# EAGLE board PortableAlarmSystem2 (EAGLE 9.5.2)
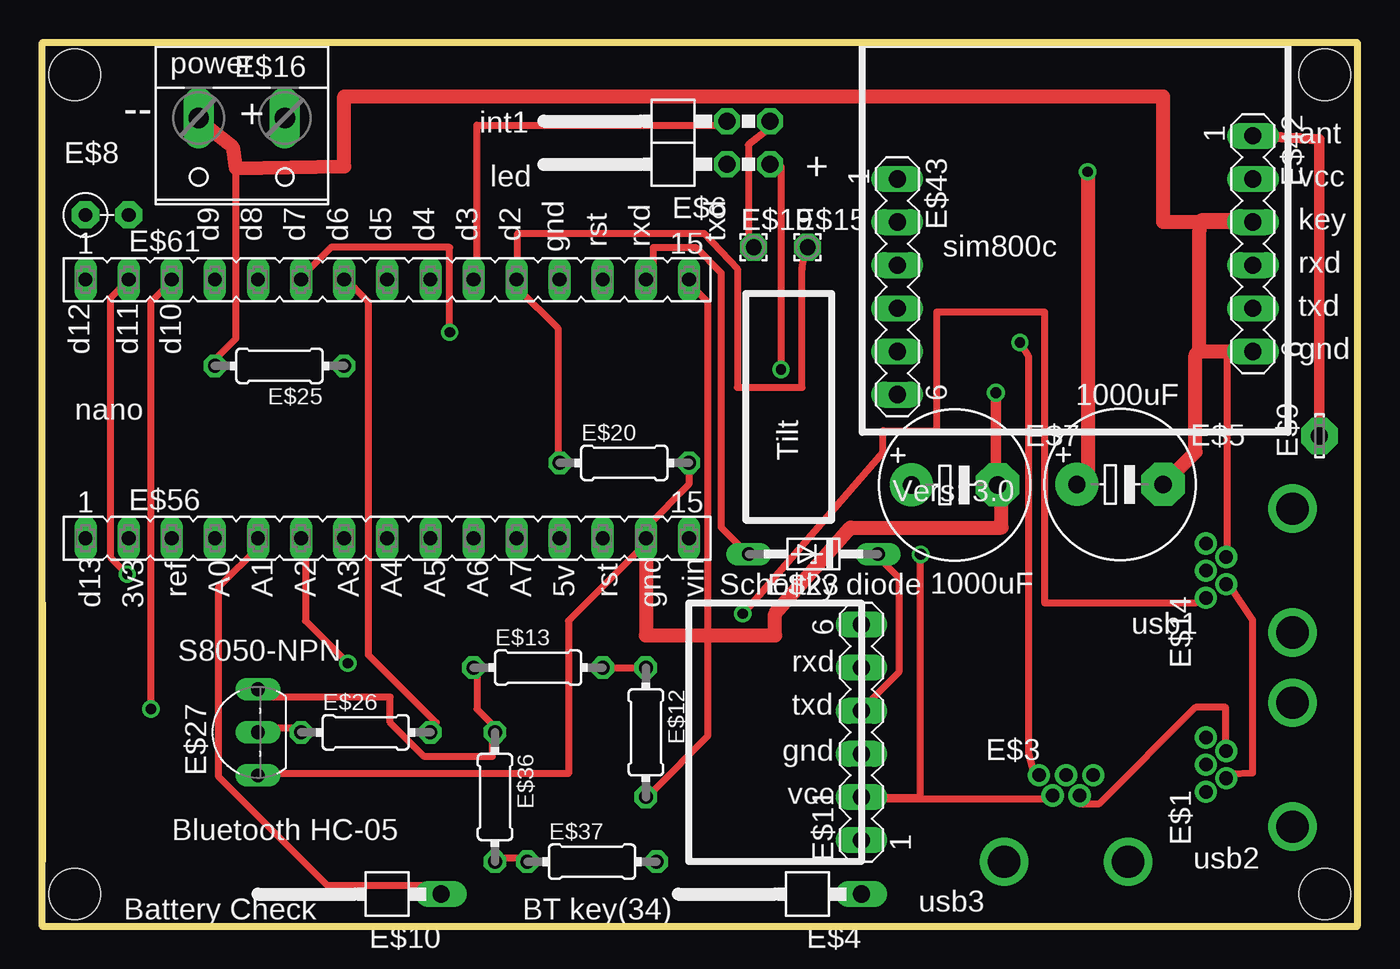
[diagram p0: board, top side]
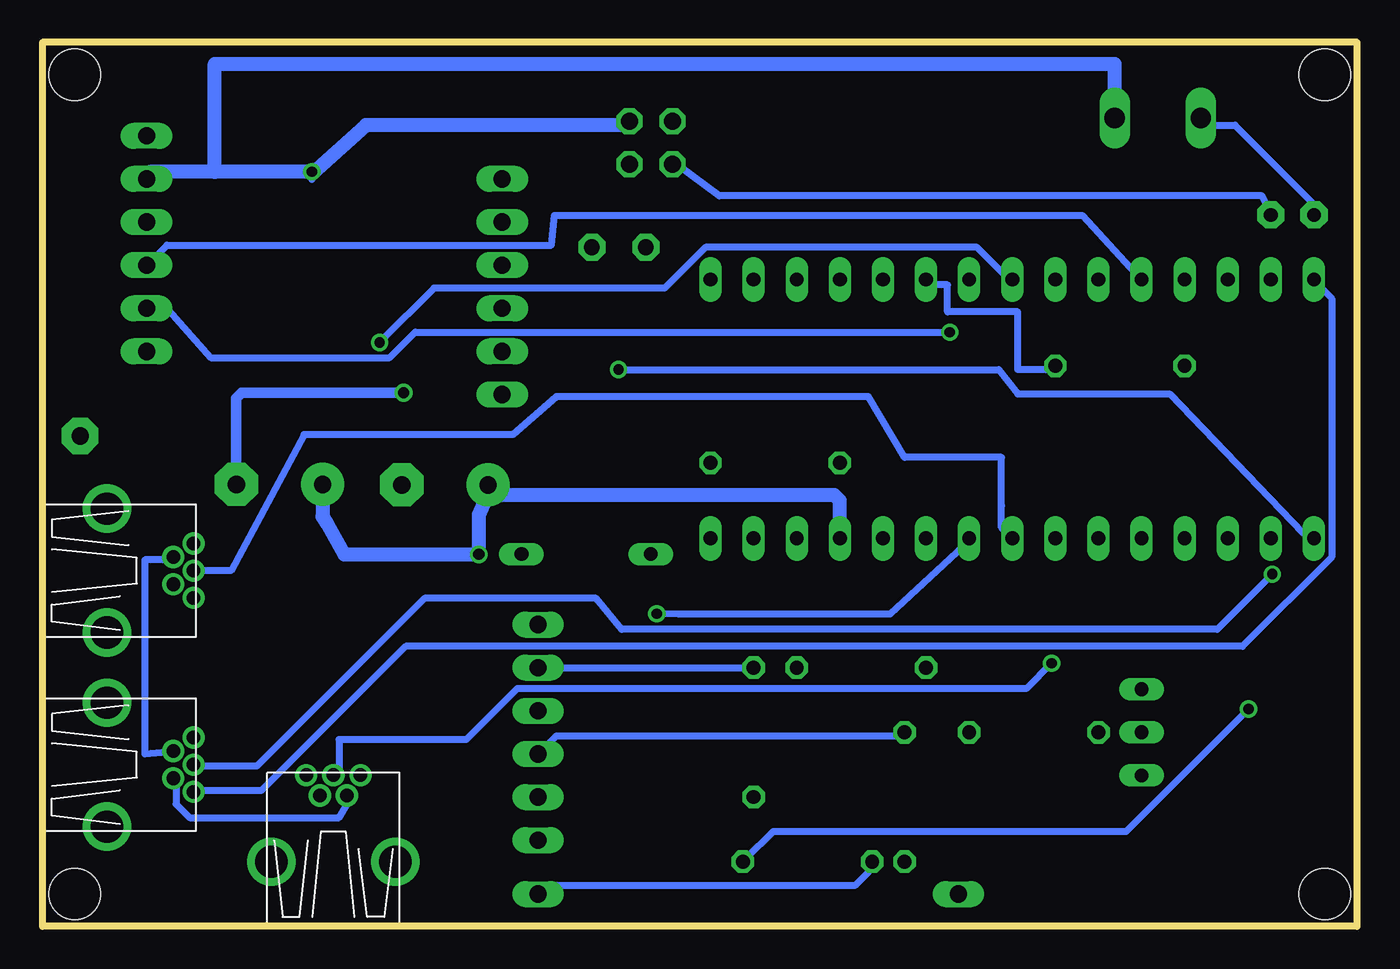
[diagram p1: board, bottom side, seen from below]

Size 77.47 x 52.07 mm. Coordinates in mm from the lower left corner, seen from the top.
Outline: 0,0 0,52.07 77.47,52.07 77.47,0 0,0
Copper layers (1*16): Top 0.035mm / dielectric 1.5mm / Bottom 0.035mm
Design rules "default": minimum track width 10mil, minimum drill 24mil, track to track 8mil, track to pad 8mil, pad to pad 8mil, via to via 8mil, smd to smd 8mil, copper to edge 40mil, drill to drill 8mil, minimum pad ring 10mil, minimum via ring 8mil, stop-mask expansion 4mil, vias tented up to drill 0mil, thermal gap 10mil
Holes 3 mm at 1.91,50.16 75.56,50.16 1.91,1.91 75.56,1.91

## Footprints (pad centres in the part's own frame; a part is rotated, then mirrored left to right if it is on the bottom)
USB-MB-H = drill 0.8: D+ 5.1,0; D- 3.9,0.8; GND 5.1,-1.6; ID 3.9,-0.8; VBUS 5.1,1.6 | drill 1.9: P$6 0,-3.65; P$7 0,3.65
1X01/90 = drill 1.016 long: 1 -1.27,-3.81
E5-8,5 = drill 1.016 pad 2.54: + -2.54,0 | drill 1.016 pad 2.54 octagon: - 2.54,0
2X02/90 = drill 1.016 octagon: 1 -1.27,-6.35; 2 -1.27,-3.81; 3 1.27,-6.35; 4 1.27,-3.81
RS-2,5 = drill 0.813 pad 1.6 octagon: 1 -1.27,0; 2 1.27,0
LSP10 = drill 1.016 pad 2.159 octagon: MP 0,0
MA06-1 = drill 1.016 long: 1 -6.35,0; 2 -3.81,0; 3 -1.27,0; 4 1.27,0; 5 3.81,0; 6 6.35,0
0204/7 = drill 0.813 octagon: 1 -3.81,0; 2 3.81,0
1,6/0,9 = drill 0.914 pad 1.6 octagon: 1 0,0
W237-132 = drill 1.194 long: 1 -2.54,-0.635; 2 2.54,-0.635
DO34Z7 = drill 0.813 long: A 3.81,0; C -3.81,0
TO92- = drill 0.813 long: 1 2.54,0; 2 0,0; 3 -2.54,0
FE15 = drill 0.813 long: 1 -17.78,0; 2 -15.24,0; 3 -12.7,0; 4 -10.16,0; 5 -7.62,0; 6 -5.08,0; 7 -2.54,0; 8 0,0; 9 2.54,0; 10 5.08,0; 11 7.62,0; 12 10.16,0; 13 12.7,0; 14 15.24,0; 15 17.78,0

## Placement (x,y rotation side)
E$1  [USB-MB-H]  73.66,9.53 180 top
E$3  [USB-MB-H]  60.33,3.81 90 top
E$4  [1X01/90]  44.45,3.17 90 top
E$5  [E5-8,5]  63.5,26.04 0 top
E$6  [2X02/90]  36.53,46.16 90 top
E$7  [E5-8,5]  53.75,26 0 top
E$8  220 R  [RS-2,5]  3.81,41.91 0 top
E$9  [LSP10]  75.25,28.89 90 top
E$10  [1X01/90]  19.68,3.17 90 top
E$11  [MA06-1]  48.26,11.43 90 top
E$12  10k  [0204/7]  35.56,11.43 270 top
E$13  22k  [0204/7]  29.21,15.24 0 top
E$14  [USB-MB-H]  73.66,20.95 180 top
E$15  [1,6/0,9]  45.09,40.01 0 top
E$16  [W237-132]  11.75,46.99 180 top
E$19  [1,6/0,9]  41.91,40.01 0 top
E$20  10k  [0204/7]  34.29,27.3 0 top
E$23  [DO34Z7]  45.43,21.93 180 top
E$25  10k  [0204/7]  13.97,33.02 180 top
E$26  2.2k  [0204/7]  19.05,11.43 0 top
E$27  [TO92-]  12.7,11.43 90 top
E$36  22k  [0204/7]  26.67,7.62 270 top
E$37  10k  [0204/7]  32.38,3.81 0 top
E$42  [MA06-1]  71.33,40.22 270 top
E$43  [MA06-1]  50.38,37.68 270 top
E$56  [FE15]  20.32,22.86 0 top
E$61  [FE15]  20.32,38.1 0 top

## Library data of the parts
E$1 E$3 E$14 = con-usb-3
E$4 E$6 E$10 = pinhead
E$5 E$7 = ref-packages-longpad
E$8 = discrete
E$9 = solpad
E$11 E$42 E$43 = con-lstb
E$12 E$13 E$20 E$25 E$26 E$36 E$37 = eagle-ltspice
E$15 E$19 = wirepad
E$16 = con-wago-508
E$23 = ref-packages
E$27 = transistor-fet
E$56 E$61 = con-lsta

## Nets
S$2: E$1.ID E$3.ID E$5.- E$7.- E$8.1 E$14.ID E$16.2 E$20.2 E$25.2 E$27.3 E$42.3 E$42.6 E$56.14
S$3: E$11.4 E$23.C
S$4: E$1.D- E$3.D- E$5.+ E$6.3 E$7.+ E$11.2 E$14.D- E$16.1 E$19.1 E$42.2 E$56.12
S$5: E$37.2 E$61.3
S$7: E$6.2 E$8.2
S$8: E$6.4 E$25.1 E$61.10
S$9: E$9.MP E$42.1
S$10: E$26.1 E$27.2
S$11: E$12.2 E$61.15
S$12: E$42.5 E$61.6
S$13: E$42.4 E$61.5
S$14: E$23.A E$61.14
S$15: E$1.VBUS E$61.1
S$16: E$1.D+ E$61.2
S$17: E$3.VBUS E$61.8
S$18: E$11.3 E$13.1 E$27.1 E$36.1
S$19: E$61.12
S$20: E$26.2 E$61.7
S$21: E$61.13
S$22: E$6.1 E$56.1
S$23: E$56.2
S$24: E$56.3
S$25: E$3.D+ E$56.6
S$27: E$10.1 E$56.5
S$29: E$56.7
S$30: E$14.D+ E$56.8
S$31: E$4.1 E$36.2 E$37.1
S$32: E$14.VBUS E$56.9
S$34: E$11.5 E$12.1 E$13.2
S$35: E$15.1 E$20.1 E$61.11
S$37: E$56.13
S$38: E$56.15

## Tracks (layer width: path | path; a pad name or v marks a point on that pad's centre or on a via)
S$2  (via drill 0.65)
  Top 0.152: E$42.3 71.12,41.59
  Top 0.254: E$7.- 56.5,26 56.52,26 | 35.5,22.5 E$56.14 | 13,9 E$27.3
  Top 0.406: E$20.2 38.1,26.04 35.56,23.5 E$56.14 | 35.5,22.5 31,18 31,9 13,9 | 11.4,44.67 11.4,34.62 10.4,33.6 E$25.2 | 9.6,47.2 E$16.2 | 69.8,33.87 69.8,22.4 E$14.ID | E$1.ID 69.73,10.28 69.73,12.9 67.95,12.9 62.25,7.2 61.12,7.2 E$3.ID
  Top 0.61: 56.52,26.04 56.2,26.35 v56.2,31.43 | 69.8,33.87 E$42.6
  Top 0.813: 56.52,26.04 56.52,26 56.52,23.5 47.62,23.5 43.18,18.41 43.18,17.14 35.56,17.14 E$56.14 | E$42.3 66.04,41.49 66.04,48.9 17.78,48.9 17.78,44.77 11.4,44.67 11.2,45.92 9.6,47.2 | E$5.- 67.94,27.94 67.94,33.66 68.16,33.87 | 68.16,33.87 E$42.6 | 71.12,41.59 68.26,41.59 68.16,40.85 68.16,33.87
  Bottom 0.254: 56.5,26 E$7.-
  Bottom 0.406: E$8.1 2.4,42.4 7.2,47.2 8.8,47.2 E$16.2 | E$14.ID 70.4,21.6 71.44,21.59 71.44,10.16 E$1.ID
  Bottom 0.61: v56.2,31.43 65.72,31.43 66.04,31.11 E$5.-
S$3
  Top 0.254: 48.5,13 E$11.4
  Top 0.406: 48.5,13 50.5,15 50.5,20.5 49.5,21.5 E$23.C
S$4  (via drill 0.61, 0.65)
  Top 0.254: 70,20 E$14.D- | 70,9 E$1.D- | 59.5,7.5 E$3.D- | 48.5,7.5 E$11.2 | 61.28,25.72 61,26 E$5.+
  Top 0.406: 70,20 71.32,18.05 71.32,9.05 70,9 | 59.5,7.5 48.5,7.5 | E$19.1 41.59,40.64 41.59,46.04 42.82,47 E$6.3 | E$11.2 51.75,7.62 v51.75,21.91
  Top 0.813: v61.59,44.45 61.59,26.04 61.28,25.72 60.96,25.4
  Bottom 0.254: 70,20 E$14.D- | 60.5,26 E$5.+
  Bottom 0.406: E$1.D- 69.6,8.8 69.6,7.2 68.8,6.4 60,6.4 59.52,7.2 E$3.D- | E$42.2 arc60 71.12,44.45 | v61.59,44.45 61.59,44 61.6,44.32 | 43.2,47.2 E$6.3
  Bottom 0.813: 51.24,25.4 E$7.+ | 51.24,25.4 30.8,25.4 30.48,25.08 E$56.12 | 67.31,44.45 71.12,44.45 | 67.31,44.45 67.31,50.8 14.29,50.8 E$16.1 | v61.59,44.45 67.31,44.45 | 61.6,44.32 58.4,47.2 43.2,47.2 | E$5.+ 60.96,24.13 60.68,23.71 59.69,21.91 v51.75,21.91 51.75,24.25 51.24,25.4
S$5  (via drill 0.61)
  Top 0.406: v6.4,12.8 6.4,36.8 7.2,37.6 E$61.3
  Bottom 0.406: v6.4,12.8 13.6,5.6 34.4,5.6 36,4 E$37.2
S$7
  Bottom 0.406: E$6.2 40,44.8 37.6,43.03 5.6,43.03 E$8.2
S$8
  Top 0.406: E$6.4 40,47.2 25.6,47.2 25.6,38.4 E$61.10
  Bottom 0.406: E$61.10 25.08,37.78 24.13,37.78 24.13,36.2 20,36.2 20,33.66 20,32.8 18.4,32.8 E$25.1
S$9
  Top 0.61: E$9.MP 75.25,46.35 E$42.1
S$10
  Top 0.406: E$27.2 12.8,11.68 15.2,11.68 E$26.1
S$11
  Top 0.406: E$12.2 36,8 39.2,11.2 39.2,36.8 38.4,37.6 E$61.15
S$12  (via drill 0.61)
  Top 0.254: 15.5,38.5 E$61.6
  Top 0.406: 15.5,38.5 17,40 24,40 v24,35
  Bottom 0.406: v24,35 55.5,35 57,33.5 67.55,33.5 70.05,36.32 E$42.5
S$13
  Bottom 0.254: 12.75,38.12 E$61.5 | 71.25,39 E$42.4
  Bottom 0.406: 12.75,38.12 16.19,41.88 47.3,41.88 47.47,40.12 70.12,40.12 71.25,39
S$14
  Top 0.254: 41.5,22 E$23.A
  Top 0.406: 41.5,22 40,23.5 40,38.5 38.5,40 36,40 36,38.5 E$61.14
S$15
  Bottom 0.254: 68.5,8 E$1.VBUS | 2.5,38 E$61.1
  Bottom 0.406: 68.5,8 64.57,8 56.07,16.5 6.75,16.5 1.5,21.75 1.5,37 2.5,38
S$16  (via drill 0.61)
  Top 0.254: 5,38 E$61.2
  Top 0.406: v5,20.75 4,21.75 4,37 5,38
  Bottom 0.254: 68.5,9.43 E$1.D+
  Bottom 0.406: 68.5,9.43 64.84,9.43 54.95,19.32 44.84,19.32 43.34,17.5 8.25,17.5 v5,20.75
S$17  (via drill 0.61)
  Top 0.406: v57.6,34.4 58.1,33.58 58.1,10.16 58.4,9.12 E$3.VBUS
  Bottom 0.406: v57.6,34.4 54.4,37.6 40.8,37.6 38.4,40 22.4,40 20.8,38.4 E$61.8
S$18
  Top 0.406: E$13.1 25.6,15.2 25.6,12.8 26.4,12 E$36.1 26.5,11 26.5,10 22.5,10 20.5,12 20.5,13.5 13,13.5 E$27.1
  Bottom 0.254: 48.5,10.5 E$11.3
  Bottom 0.406: E$11.3 48,10.4 47.2,11.2 27.2,11.2 E$36.1
S$20
  Top 0.406: E$26.2 23.2,12 19.2,16 19.2,36.8 18.4,37.6 E$61.7
S$22  (via drill 0.61)
  Top 0.406: v43.52,32.8 43.52,44.8 E$6.1
  Bottom 0.406: v43.52,32.8 21.12,32.8 20,31.36 11.05,31.36 3.2,23.2 E$56.1
S$25  (via drill 0.61)
  Top 0.254: 15.5,22.5 E$56.6
  Top 0.406: v18,15.5 15.5,18 15.5,22.5
  Bottom 0.254: 60,9 E$3.D+
  Bottom 0.406: 60,9 60,11 52.5,11 49.5,14 19.5,14 v18,15.5
S$27
  Top 0.406: E$56.5 12.8,22.4 10.4,20 10.4,8.8 16.8,2.4 23.2,2.4 E$10.1
S$30
  Bottom 0.406: E$14.D+ 66.36,20.95 62.06,28.96 49.75,28.96 47.2,31.2 28.8,31.2 26.67,27.62 20.95,27.62 20.95,24.8 arc-205 20.95,24.77 20.95,23.5 E$56.8
S$31
  Top 0.406: E$36.2 27.2,4 28,4 E$37.1
  Bottom 0.406: E$4.1 48,2.4 29.6,2.4 28.8,3.2 E$37.1
S$32  (via drill 0.61)
  Top 0.406: v41.27,18.41 49.53,27.94 49.53,29.21 52.7,29.21 52.7,36.2 59.05,36.2 59.05,19.05 67.94,19.05 E$14.VBUS
  Bottom 0.406: v41.27,18.41 40,18.4 27.52,18.4 23.2,22.4 E$56.9
S$34
  Top 0.406: E$13.2 33.6,15.2 35.2,15.2 E$12.1
  Bottom 0.406: E$11.5 48,15.2 36,15.2 E$12.1
S$35
  Top 0.254: 45,40 E$15.1 | 28,38.5 E$61.11
  Top 0.406: E$61.11 28,37.6 30.4,35.2 30.4,27.2 E$20.1 | 45,40 44.77,38.73 44.77,31.75 40.96,31.75 40.96,38.73 39,40.82 28,40.82 28,38.5

## Text on the board
tPlace: power | + | -- | int1 | + | ant | led | vcc | key | d9 | d8 | d7 | d6 | d5 | d4 | d3 | d2 | gnd | rst | rxd | txd | sim800c | rxd | txd | d12 | d11 | d10 | gnd | 1000uF | nano | Tilt | Vers: 3.0 | 1000uF | Schottky diode | d13 | 3v3 | ref | A0 | A1 | A2 | A3 | A4 | A5 | A6 | A7 | 5v | rst | gnd | vin | usb1 | S8050-NPN | rxd | txd | gnd | vcc | Bluetooth HC-05 | usb2 | usb3 | Battery Check | BT key(34)